# Altium PCB esp12e_adaptor.PcbDoc
Units mil, origin at the board's own origin, x right, y up, seen from the top; angles counter-clockwise.
Board outline 6000 x 4000 mil, 2 copper layers (Top Layer, Bottom Layer); 18 components, 20 nets, 69 pads, 12 vias.
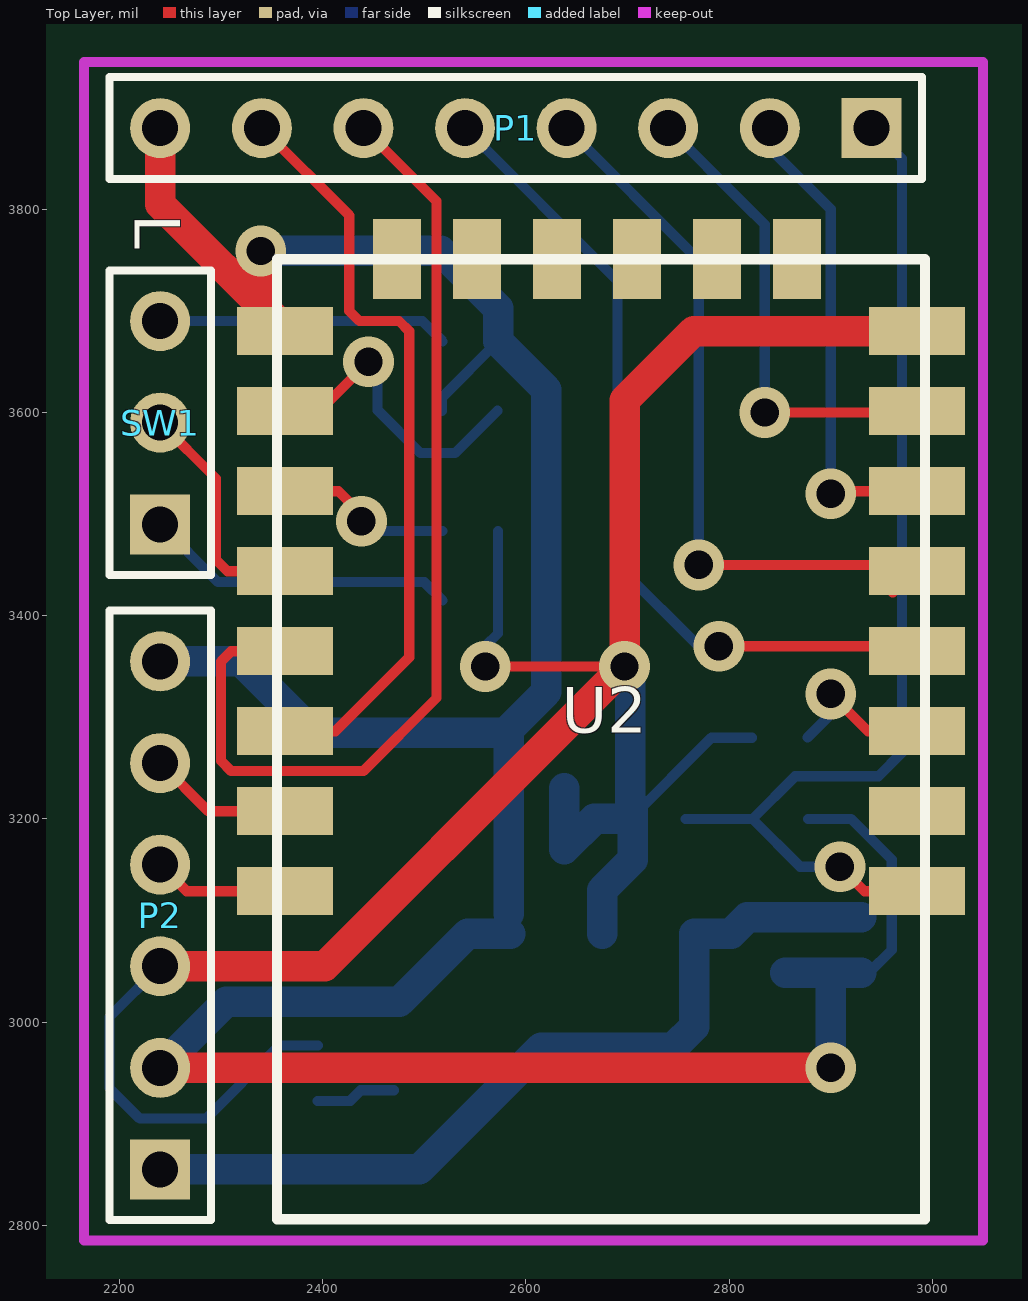
[diagram p0: Top Layer view]
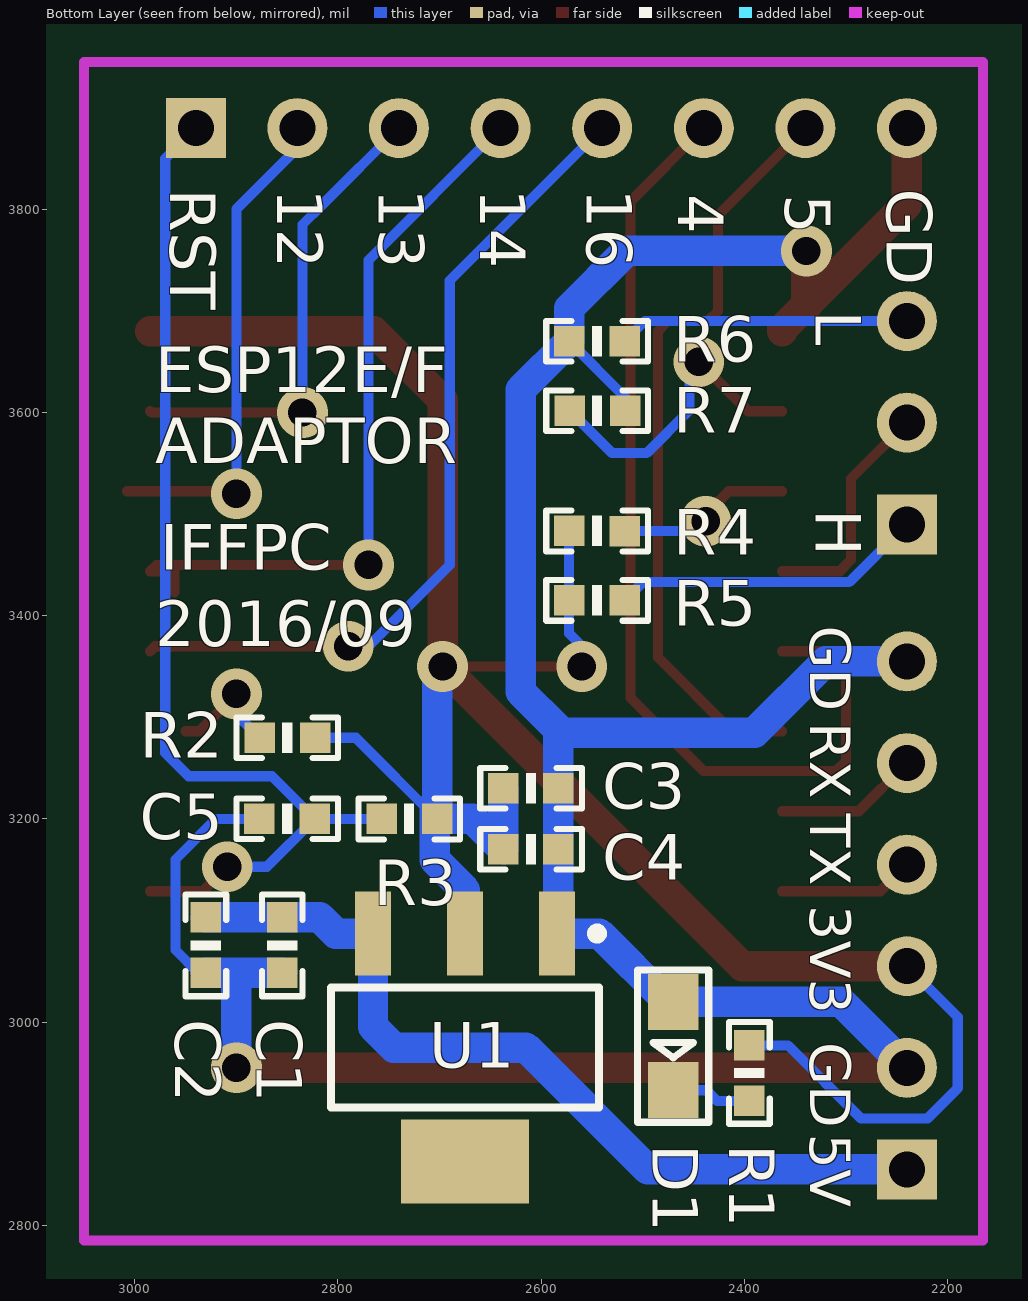
[diagram p1: Bottom Layer view, seen from below]

## Layer stack, top to bottom
Top Solder: solder mask 0.4, Solder Resist, Dk 3.5
Top Layer: signal copper 1.4
Dielectric 1: dielectric 12.6, FR-4, Dk 4.8
Bottom Layer: signal copper 1.4
Bottom Solder: solder mask 0.4, Solder Resist, Dk 3.5

## Board outline
1000,1000 7000,1000 7000,5000 1000,5000

## Design rules (kind name [scope] priority, off if disabled: settings)
Clearance [All] p1: gap=10
PolygonConnect [All] p1: connectstyle=Relief reliefconductorwidth=10 reliefentries=4 polygonreliefangle="90 Angle" airgapwidth=10
RoomDefinition esp12e_adaptor [InComponentClass('esp12e_adaptor')] p1: confinementstyle=ConfineIn formatcopy=TRUE lockcomponents=FALSE outline 2165,2775 3070,2775 3070,3960 2165,3960
RoutingVias [All] p1: holewidth=28 width=50 viastyle="Through Hole" minholewidth=28 minwidth=50 maxholewidth=28 maxwidth=50
SolderMaskExpansion [All] p1: expansion=4
Width [All] p1: maxlimit=30 minlimit=10 preferedwidth=10
30 further rules are at their usual default settings.

## Classes and differential pairs
component class esp12e_adaptor: C1 C2 C3 C4 C5 D1 P1 R1 R2 R3 R4 R5 R6 R7 SW1 U1 U2

## Components (designator, comment, footprint, x,y, rotation, side; value= is the part's Value field where it differs from the comment)
C1 "106" 0603P 2855.06,3075.5 r90 bottom
C2 "104" 0603P 2930.06,3075.5 r90 bottom
C3 "106" 0603P 2610,3230 r0 bottom
C4 "104" 0603P 2610,3170 r0 bottom
C5 "104" 0603P 2850,3200 r0 bottom
D1 "LED" SMDLED 2470,3020 r270 bottom
P1 "GPIO" HDR1X8 2940,3880 r180 top
P2 "Header 6" HDR1X6 2240,2855 r90 top
R1 "1K" 0603P 2395,2950 r270 bottom
R2 "12K" 0603P 2850,3280 r180 bottom
R3 "12K" 0603P 2730,3200 r180 bottom
R4 "12K" 0603P 2545,3483.33 r0 bottom
R5 "12K" 0603P 2545,3415 r0 bottom
R6 "12K" 0603P 2545,3670 r0 bottom
R7 "12K" 0603P 2545,3601.79 r180 bottom
SW1 "SW-SPDT" HDR1X3 2240,3490 r90 top
U1 "AMS1117-3.3" SOT223_L 2675,2975 r270 bottom
U2 "ESP8266" ESP8266 2355,3680 r0 top

## Footprints (in the part's own frame and the unit in brackets; to place one, negate y for a bottom-side part, rotate by r counter-clockwise, add the part's x,y. Pads: shape width x height; smd on the part's side, far side on the other; paste and mask are expansions set on the pad)
0603P [mil]
  rect 30x30 smd: 1(-27,0) 2(27.5,-0.06)
  silkscreen extent -50,-20 50,20
ESP8266 [mm]
  rect 2.4x1.2 smd: 1(0.2,0) 2(0.2,-2) 3(0.2,-4) 4(0.2,-6) 5(0.2,-8) 6(0.2,-10) 7(0.2,-12) 8(0.2,-14) 9(16,-14) 10(16,-12) 11(16,-10) 12(16,-8) 13(16,-6) 14(16,-4) 15(16,-2) 16(16,0)
  rect 1.2x2 smd: 17(13,1.8) 18(11,1.8) 19(9,1.8) 20(7,1.8) 21(5,1.8) 22(3,1.8)
  silkscreen extent 0,-22.2 16.2,1.8
HDR1X3 [mm] "Connector; Header; 3 Position"
  rect 1.5x1.5 hole 0.9: 1(0,0)
  round 1.5 hole 0.9: 2(2.54,0) 3(5.08,0)
  silkscreen extent -1.27,-1.27 6.35,1.27
HDR1X6 [mm]
  rect 1.5x1.5 hole 0.9: 1(0,0)
  round 1.5 hole 0.9: 2(2.54,0) 3(5.08,0) 4(7.62,0) 5(10.16,0) 6(12.7,0)
  silkscreen extent -1.27,-1.27 13.97,1.27
HDR1X8 [mm] "Connector; Header; 8 Position"
  rect 1.5x1.5 hole 0.9: 1(0,0)
  round 1.5 hole 0.9: 2(2.54,0) 3(5.08,0) 4(7.62,0) 5(10.16,0) 6(12.7,0) 7(15.24,0) 8(17.78,0)
  silkscreen extent -1.27,-1.27 19.05,1.27
SMDLED [mm]
  rect 1.4x1.27 smd: 1(0.001,-0.002) 2(2.211,-0.002)
  silkscreen extent -0.8,-0.89 3.01,0.89
SOT223_L [mm] "6.5x3.5mm, Pitch 2.3mm, Lead Span 7mm, IPC High Density"
  rect 2.1x0.9 smd: 1(-2.85,2.3) 2(-2.85,0) 3(-2.85,-2.3)
  rect 2.1x3.2 smd: 4(2.85,0)
  silkscreen extent -2.97,-3.35 1.5,3.42, body extent -1.85,-3.35 1.85,3.35, height 1.7

## Part data
C1 C2 C3 C4 C5: library part C
P1: library part "Header 8", "Header, 8-Pin"
P2: "Header, 6-Pin"
R1 R2 R3 R4 R5 R6 R7: library part R

## Via types
v1: diameter 50, hole 28, Top Layer to Bottom Layer, 12 vias

## Nets (pads, with @x,y where several pads share a name; then routed paths per layer and width w, separated by ;. In a path a pad name is that pad's centre, name@x,y a point inside that pad or via, vN(x,y) a via of type N, cw(c..) or ccw(c..) an arc to the next point about the centre after c; other vN are vias at no path point)
ADC: U2.10
CH_PD: R2.1 U2.11 | length 117.7
  Top Layer w10: v1(2900,3323) 2936.7,3286.3 U2.11@2950,3286.3
  Bottom Layer w10: R2.1 2900,3303 v1(2900,3323)
GND: C1.1 C2.1 C3.1 C4.1 C5.2 D1.1 P1.8 P2.2 P2.6 R6.2 R7.2 U1.1 U2.1 | length 3363.8
  Top Layer w30: P2.2 v1(2900,2955) ; P1.8 2240,3805 2362.87,3682.13 U2.1 ; 2339,3703.87 v1(2339,3759)
  Bottom Layer w10: D1.1 D1.1@2475.46,3019.97 ; R7.2 2517.5,3615.06 R6.2 ; 2580,3285 2583,3282 C3.1 C4.1 U1.1@2583,3106.56 ; C1.1 2900,3048.5 C2.1 2937.5,3048.5 2960,3071 2960,3160.06 2920,3200.06 C5.2
  Bottom Layer w30: P2.2 2304.97,3019.97 D1.1 ; P2.6 2320,3355 2390,3285 2580,3285 ; v1(2339,3759) 2516,3759 2572.5,3702.5 R6.2 2620,3622.56 2620,3499.23 2620,3325 2583,3288 C3.1 C4.1 U1.1@2583,3106.56 ; D1.1@2475.46,3019.97 2542.7,3087.2 U1.1 ; C1.1 C2.1 ; v1(2900,2955) 2900,3048.5
GPIO0: SW1.2 U2.4 | length 230.3
  Top Layer w10: SW1.2 2295,3535 2295,3455 2306.22,3443.78 U2.4
GPIO0_H: R5.1 SW1.1 | length 309.1
  Bottom Layer w10: SW1.1 2296.94,3433.06 2499.94,3433.06 R5.1
GPIO0_L: R6.1 SW1.3 | length 286.3
  Bottom Layer w10: SW1.3 2498,3690 R6.1
GPIO2: R4.1 U2.3 | length 175.5
  Top Layer w10: U2.3 2415.48,3522.52 2438,3500 v1(2438,3493)
  Bottom Layer w10: v1(2438,3493) 2447.67,3483.33 R4.1
GPIO4: P1.6 U2.5 | length 1001.8
  Top Layer w10: U2.5 2310,3365.04 2300,3355.04 2300,3257 2310,3247 2440,3247 2512,3319 2512,3808 P1.6
GPIO5: P1.7 U2.6 | length 756.3
  Top Layer w10: P1.7 2426,3794 2426,3700 2436,3690 2475.12,3690 2485.12,3680 2485.12,3359.12 2412.3,3286.3 U2.6
GPIO12: P1.2 U2.14 | length 493.4
  Top Layer w10: v1(2900,3520) 2902.52,3522.52 U2.14 U2.14@3007.52,3522.52
  Bottom Layer w10: P1.2 2840,3860 2900,3800 v1(2900,3520)
GPIO13: P1.3 U2.15 | length 469.8
  Top Layer w10: v1(2835,3600) 2983.66,3600 U2.15
  Bottom Layer w10: P1.3 2816,3804 2835,3785 v1(2835,3600)
GPIO14: P1.4 U2.13 | length 746
  Top Layer w10: v1(2770,3450) 2978.7,3450 U2.13 2961,3443.78 U2.13@2961,3423
  Bottom Layer w10: P1.4 2770,3750 v1(2770,3450)
GPIO15: R7.1 U2.2 | length 311.9
  Top Layer w10: U2.2 2396.26,3601.26 v1(2445,3650)
  Bottom Layer w10: v1(2445,3650) 2454,3650 2454,3602.21 2496.21,3560 2530.21,3560 R7.1
GPIO16: P1.5 U2.12 | length 826.4
  Top Layer w10: v1(2789.96,3370) 2979.96,3370 U2.12
  Bottom Layer w10: P1.5 2690,3730 2690,3450 2774.96,3365.04 2779.92,3370 v1(2789.96,3370)
NetD1_2: D1.2 R1.2 | length 79.3
  Bottom Layer w10: R1.2 2427,2922.5 2437.46,2932.96 D1.2
RESET: C5.1 P1.1 R3.1 U2.9 | length 1058.8
  Top Layer w10: v1(2909,3153) 2933.18,3128.82 U2.9
  Bottom Layer w10: R3.1 C5.1 ; v1(2909,3153) 2870,3153 C5.1 ; P1.1 2970,3850 2970,3265 2947,3242 2865,3242 C5.1
RXD: P2.5 U2.7 | length 142.5
  Top Layer w10: P2.5 2287.44,3207.56 U2.7
TXD: P2.4 U2.8 | length 133.7
  Top Layer w10: P2.4 2266.18,3128.82 U2.8
VCC5V: C1.2 C2.2 P2.1 U1.3 | length 846.4
  Bottom Layer w30: P2.1 2495,2855 2615,2975 2745,2975 2765.55,2995.55 U1.3 2802,3087.2 2817.8,3103 C1.2 C2.2
VDD3V3: C3.2 C4.2 P2.3 R1.1 R2.2 R3.2 R4.2 R5.2 U1.2 U2.16 | length 2519.1
  Top Layer w10: v1(2560,3350) v1(2697,3350) v1@2705,3350
  Top Layer w30: P2.3 2402,3055 2632,3285 v1(2697,3350) 2697,3612 2765,3680 2855,3680 U2.16
  Bottom Layer w10: P2.3 2190,3005 2190,2935 2220,2905 2285,2905 2357,2977 R1.1 ; v1@2560,3370 2572.5,3382.5 R5.2 R4.2 ; R3.2 2782.5,3279.94 R2.2 ; 2705,3215 v1@2705,3350
  Bottom Layer w30: C3.2 C4.2 2667.37,3199.94 R3.2 v1@2702.5,3344.5 ; U1.2 2675,3130 2705,3160 2705,3215
pads on no net: U1.4 U2.17 U2.18 U2.19 U2.20 U2.21 U2.22

## Keep-outs
Keep-Out Layer:
  lines w10: 2165,2785 2165,3945 3050,3945 3050,3935 3050,2785 2165,2785

## Silkscreen, mask and mechanical layers (free items; w line width, h text height)
Top Overlay:
  text "L" at 2215,3795 h45 r270
Bottom Overlay:
  text "GD" at 2260,3820 h45 r90
  text "16" at 2555,3820 h45 r90
  text "14" at 2660,3820 h45 r90
  text "13" at 2760,3820 h45 r90
  text "12" at 2860,3820 h45 r90
  text "RST" at 2965,3820 h45 r90
  text "5" at 2360,3815 h45 r90
  text "4" at 2465,3815 h45 r90
  text "L" at 2330,3700 h45 r90
  text "ESP12E/F" at 2980,3620 h45
  text "ADAPTOR" at 2980,3550 h45
  text "H" at 2330,3505 h45 r90
  text "IFFPC" at 2975,3445 h45
  text "GD" at 2335,3390 h40 r90
  text "2016/09" at 2980,3370 h45
  text "RX" at 2335,3295 h40 r90
  text "TX" at 2335,3205 h40 r90
  text "3V3" at 2335,3115 h40 r90
  text "GD" at 2335,2980 h40 r90
  text "5V" at 2335,2890 h40 r90